# Altium PCB AD9854_V2.1_20130905.PcbDoc (part 1 of 3)
Units mil, origin at the board's own origin, x right, y up, seen from the top; angles counter-clockwise.
Board outline 3519.8 x 3096.6 mil, 2 copper layers (Top Layer, Bottom Layer); 99 components, 61 nets, 371 pads, 189 vias.
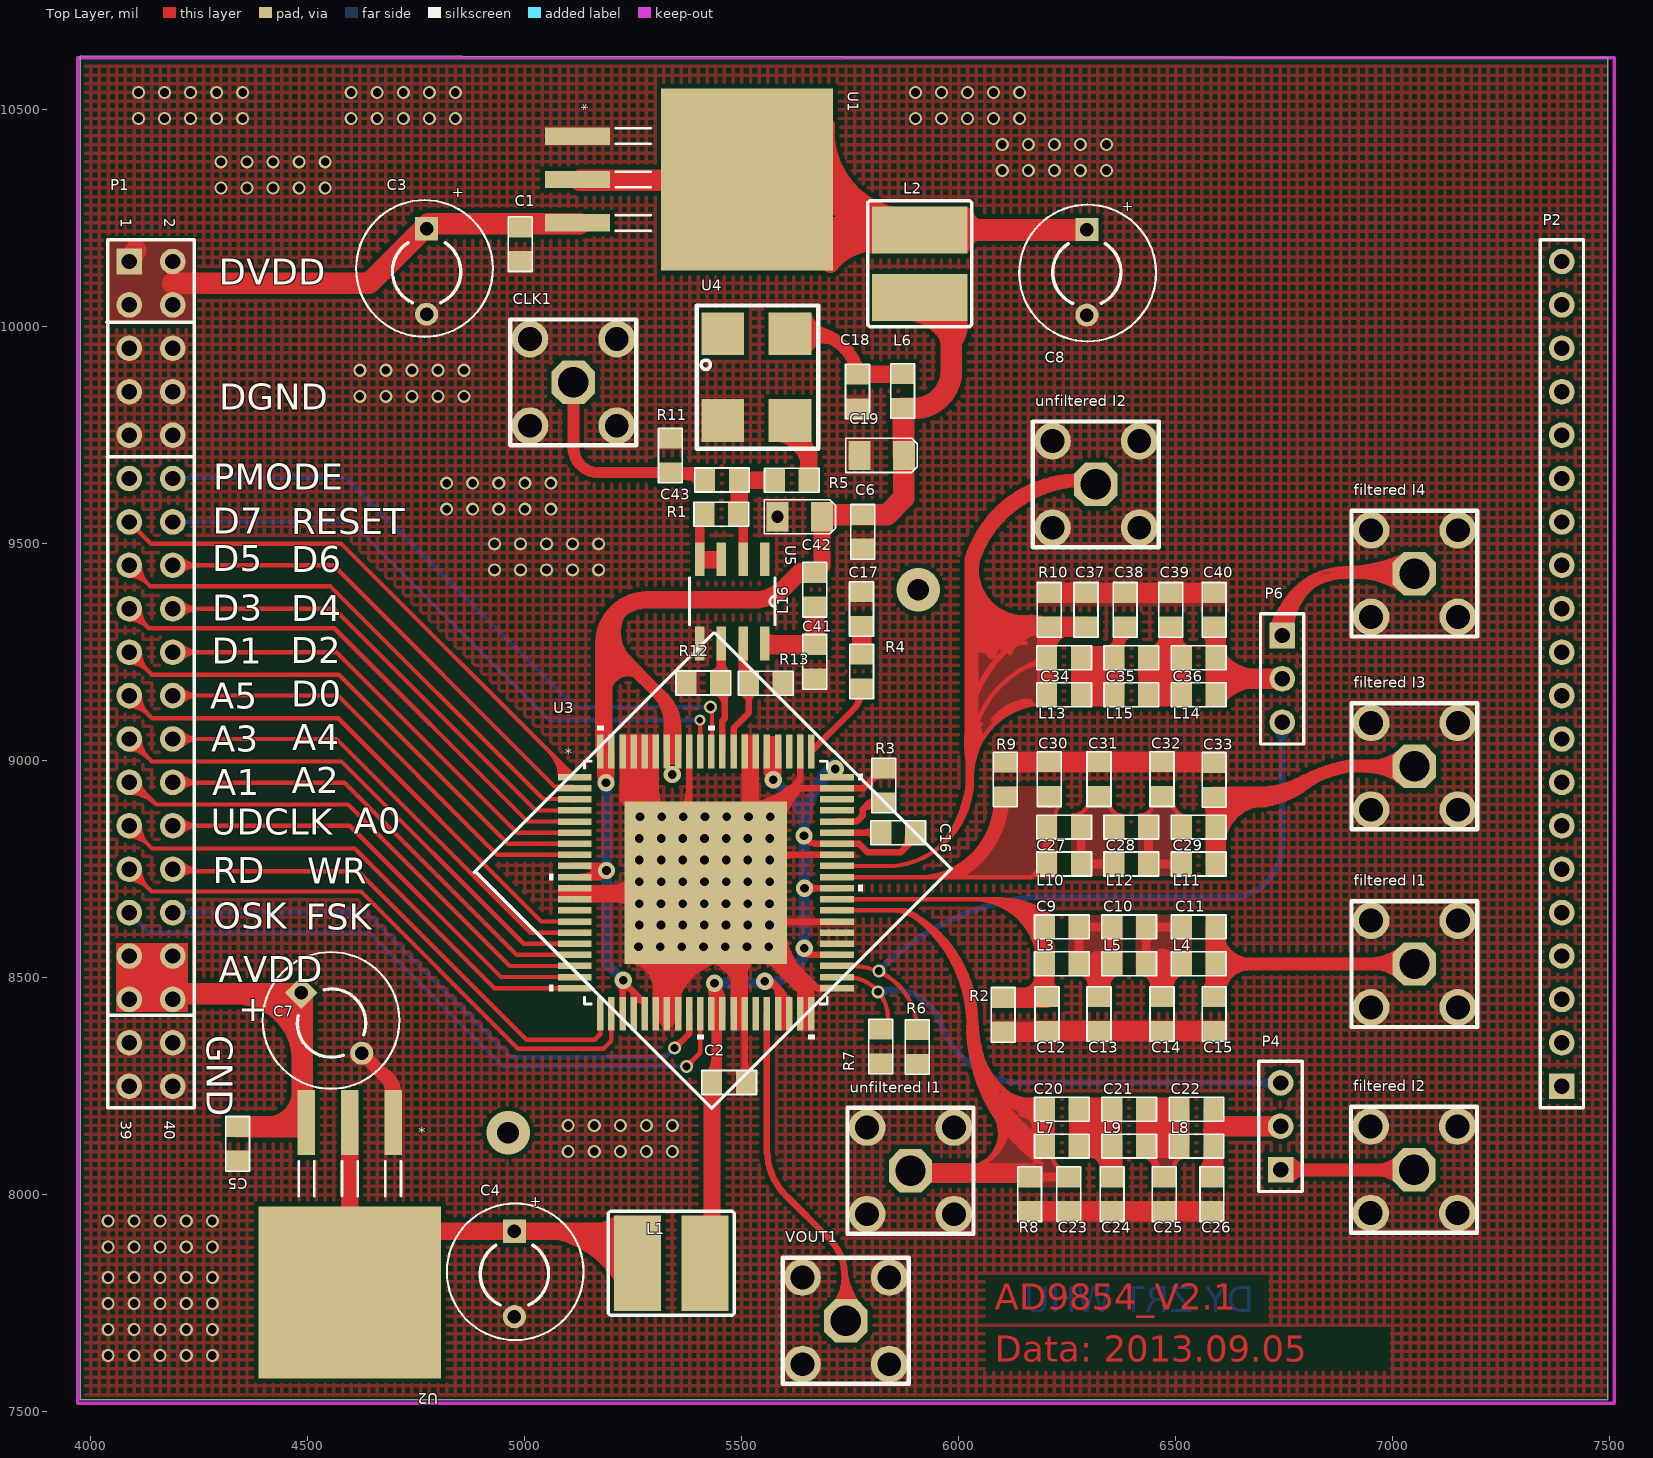
[diagram p0: Top Layer view]
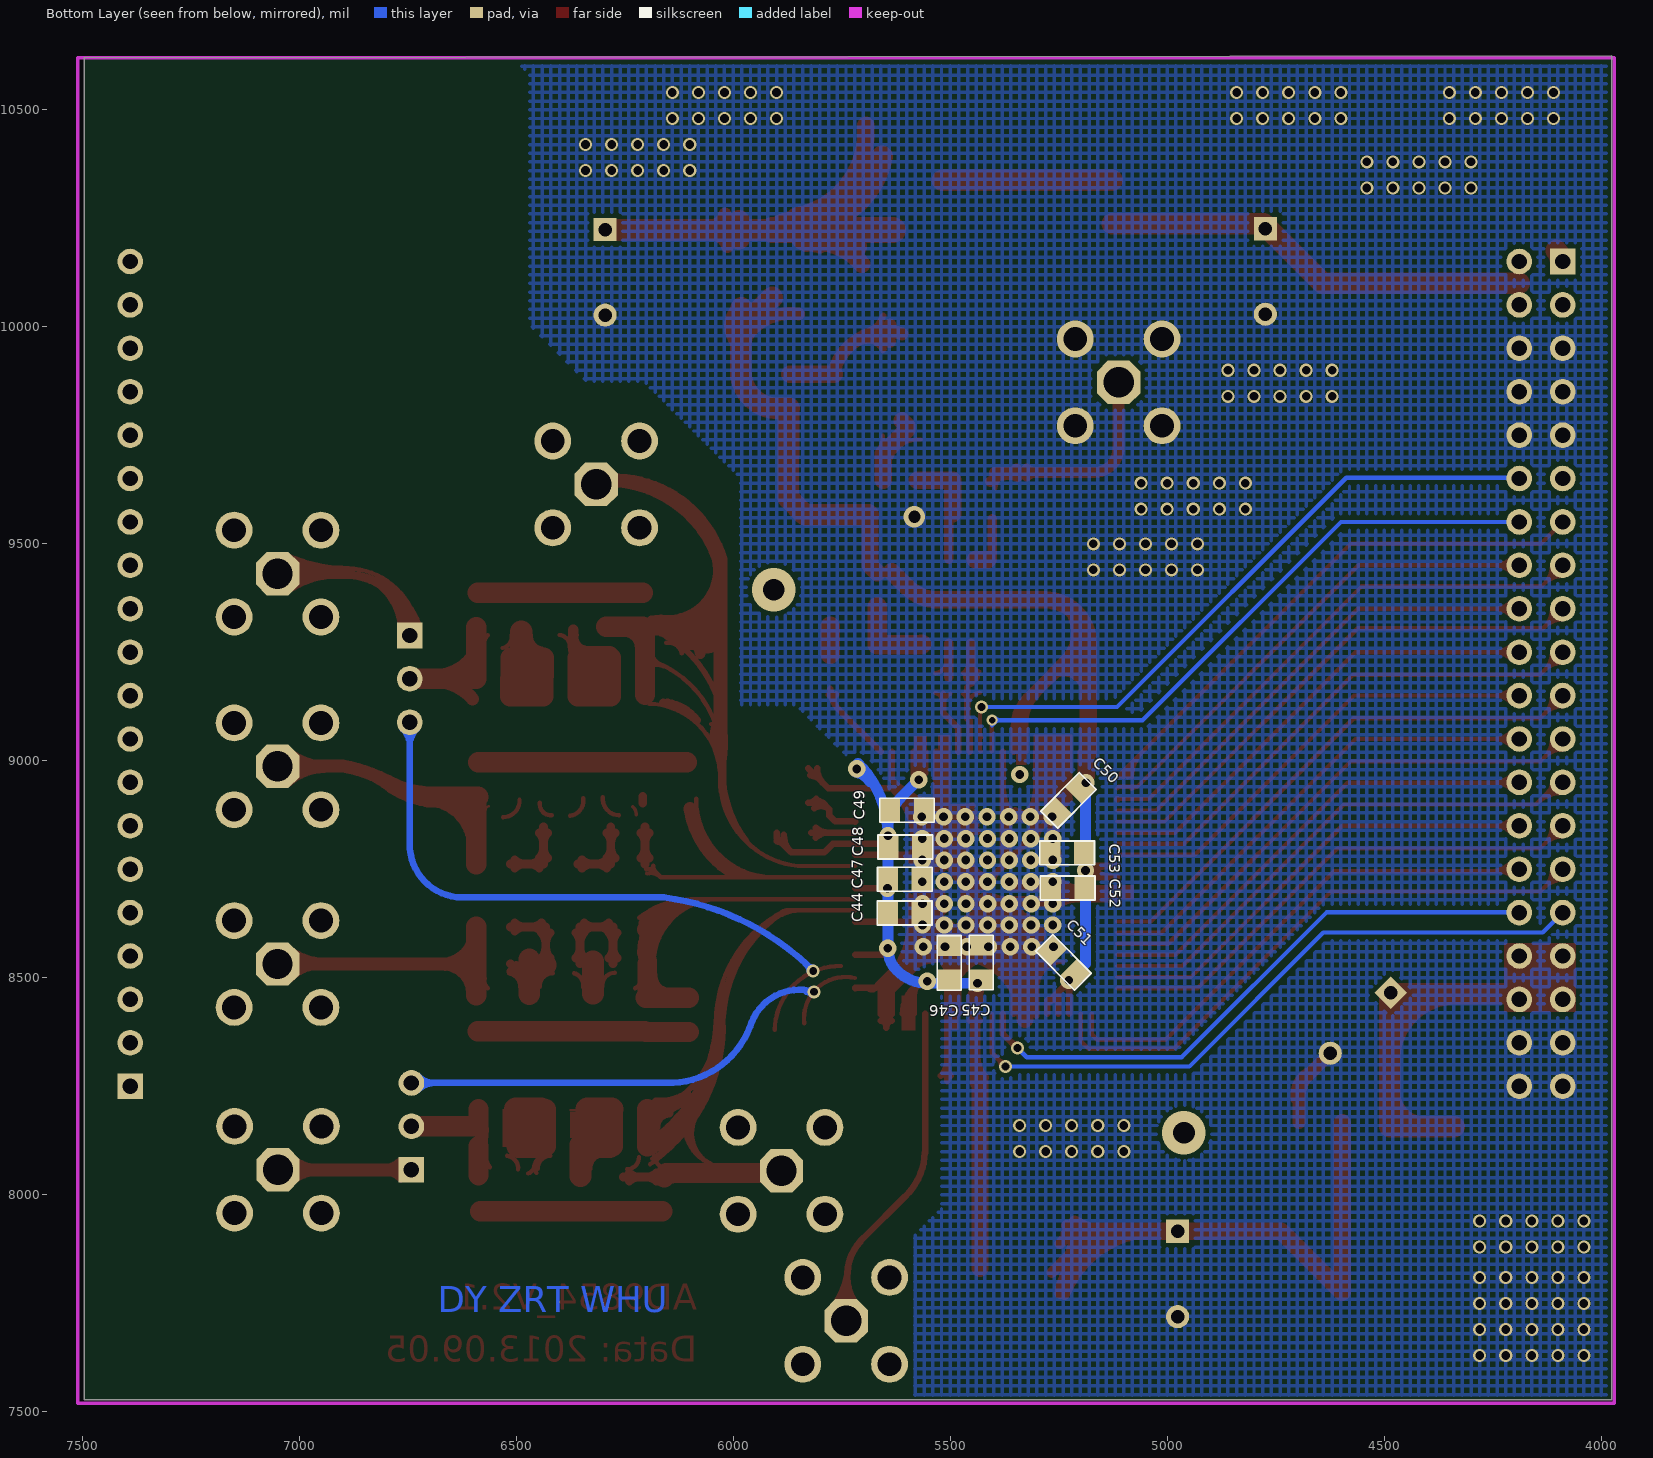
[diagram p1: Bottom Layer view, seen from below]

## Layer stack, top to bottom
Top Layer: signal copper 1.4
Dielectric: dielectric 12.6, FR-4, Dk 4.8
Bottom Layer: signal copper 1.4

## Board outline
3975.6,10624.6 3975.6,7528 7495.4,7528 7495.4,10619.5

## Design rules (kind name [scope] priority, off if disabled: settings)
Clearance [All] p1: gap=10
PlaneConnect [All] p1: planeconnectstyle=Direct reliefexpansion=20 reliefentries=4 reliefconductorwidth=10 reliefairgap=10
PolygonConnect [All] p1: connectstyle=Direct reliefconductorwidth=10 reliefentries=4 polygonreliefangle="90 Angle" airgapwidth=10
RoutingCorners [All] p1: cornerstyle=Round minsetback=100 maxsetback=100
RoutingVias [All] p1: holewidth=28 width=50 viastyle="Through Hole" minholewidth=28 minwidth=50 maxholewidth=28 maxwidth=50
SolderMaskExpansion [All] p1: expansion=4
Width [All] p1: maxlimit=60 minlimit=5 preferedwidth=10
26 further rules are at their usual default settings.

## Components (designator, comment, footprint, x,y, rotation, side; value= is the part's Value field where it differs from the comment)
C1 "Cap" 0805 4984.4,10190 r270 top
C2 "Cap" 0805 5471.23,8254 r0 top
C3 "Cap2" CAPR5-4X5 4773.8,10127.5 r270 top
C4 "Cap2" CAPR5-4X5 4976.03,7818 r270 top
C5 "Cap" 0805 4333.4,8117 r270 top
C6 "Cap" 0805 5773.43,9527 r270 top
C7 "Cap2" CAPR5-4X5 4554.8,8396 r315 top
C8 "Cap2" CAPR5-4X5 6294.83,10125.5 r270 top
C9 "Cap" 0805 6238.03,8612.5 r0 top
C10 "Cap" 0805 6393.03,8612.5 r0 top
C11 "Cap" 0805 6553.03,8612.5 r0 top
C12 "Cap" 0805 6208.03,8417.5 r90 top
C13 "Cap" 0805 6328.03,8417.5 r90 top
C14 "Cap" 0805 6473.03,8417.5 r90 top
C15 "Cap" 0805 6593.03,8417.5 r90 top
C16 "Cap" 0805 5860.63,8829.5 r0 top
C17 "Cap" 0805 5780.83,9350.5 r90 top
C18 "Cap" 0805 5761.43,9850.5 r270 top
C19 "Cap Pol" "c1206 - duplicate" 5822.03,9704 r0 top
C20 "Cap" 0805 6238.03,8192.5 r0 top
C21 "Cap" 0805 6393.03,8192.5 r0 top
C22 "Cap" 0805 6548.03,8192.5 r0 top
C23 "Cap" 0805 6258.03,8002.5 r90 top
C24 "Cap" 0805 6358.03,8002.5 r90 top
C25 "Cap" 0805 6478.03,8002.5 r90 top
C26 "Cap" 0805 6588.03,8002.5 r90 top
C27 "Cap" 0805 6243.03,8842.5 r0 top
C28 "Cap" 0805 6398.03,8842.5 r0 top
C29 "Cap" 0805 6553.03,8842.5 r0 top
C30 "Cap" 0805 6203.03,8957.5 r270 top
C31 "Cap" 0805 6318.03,8957.5 r270 top
C32 "Cap" 0805 6463.03,8957.5 r270 top
C33 "Cap" 0805 6583.03,8955.5 r270 top
C34 "Cap" 0805 6243.03,9232.5 r0 top
C35 "Cap" 0805 6398.03,9232.5 r0 top
C36 "Cap" 0805 6553.03,9232.5 r0 top
C37 "Cap" 0805 6288.03,9347.5 r270 top
C38 "Cap" 0805 6378.03,9347.5 r270 top
C39 "Cap" 0805 6483.03,9347.5 r270 top
C40 "Cap" 0805 6583.03,9347.5 r270 top
C41 "Cap" 0805 5672.83,9229 r90 top
C42 "Cap Pol" "c1206 - duplicate" 5633.63,9562.5 r0 top
C43 "Cap" 0805 5455.03,9642 r0 top
C44 "Cap" 0805 5605.4,8654.5 r0 bottom
C45 "Cap" 0805 5433.2,8535 r270 bottom
C46 "Cap" 0805 5507.2,8534 r270 bottom
C47 "Cap" 0805 5605.2,8732.5 r0 bottom
C48 "Cap" 0805 5604,8806.5 r0 bottom
C49 "Cap" 0805 5600,8891.12 r0 bottom
C50 "Cap" 0805 5223.4,8906 r135 bottom
C51 "Cap" 0805 5241.8,8532 r225 bottom
C52 "Cap" 0805 5228.8,8702 r180 bottom
C53 "Cap" 0805 5229.8,8783 r180 bottom
CLK1 "SMA" SMA 5011.83,9972 r0 top
"filtered I1" "SMA" SMA 6949.63,8432 r90 top
"filtered I2" "SMA" SMA 6948.63,7958 r90 top
"filtered I3" "SMA" SMA 6949.63,8887.5 r90 top
"filtered I4" "SMA" SMA 6949.63,9331.5 r90 top
L1 "ind" INDP6055X45N 5337.43,7842.5 r0 top
L2 "ind" INDP6055X45N 5909.63,10145.5 r270 top
L3 "ind" 0805 6238.03,8527.5 r0 top
L4 "ind" 0805 6553.03,8527.5 r0 top
L5 "ind" 0805 6393.03,8527.5 r0 top
L6 "ind" 0805 5865.43,9851.5 r270 top
L7 "ind" 0805 6238.03,8107.5 r0 top
L8 "ind" 0805 6548.03,8107.5 r0 top
L9 "ind" 0805 6393.03,8107.5 r0 top
L10 "ind" 0805 6243.03,8757.5 r0 top
L11 "ind" 0805 6553.03,8757.5 r0 top
L12 "ind" 0805 6398.03,8757.5 r0 top
L13 "ind" 0805 6243.03,9147.5 r0 top
L14 "ind" 0805 6553.03,9147.5 r0 top
L15 "ind" 0805 6398.03,9147.5 r0 top
L16 "ind" 0805 5673.03,9395 r90 top
P1 "Header 20X2" HDR2X20 4088.83,10150.5 r270 top (schematic designator P?)
P2 "Header 20" HDR1X20 7389.2,8250.5 r90 top (schematic designator P?)
P4 "Header 3" HDR1X3 6741.23,8058 r90 top
P6 "Header 3" HDR1X3 6745.03,9289 r270 top
R1 "Res" 0805 5452.03,9573 r180 top
R2 "Res" 0805 6107.03,8415.5 r90 top
R3 "Res" 0805 5831.83,8944 r90 top
R4 "Res" 0805 5781.03,9206.5 r90 top
R5 "Res" 0805 5614.43,9651.5 r180 top
R6 "Res" 0805 5909.23,8341.5 r90 top
R7 "Res" 0805 5825.03,8342.5 r90 top
R8 "Res" 0805 6168.03,8002.5 r90 top
R9 "Res" 0805 6102.03,8956.5 r270 top
R10 "Res" 0805 6203.03,9347.5 r270 top
R11 "Res" 0805 5330.43,9703 r270 top
R12 "Res" 0805 5412.03,9174.5 r0 top
R13 "Res" 0805 5554.83,9184 r180 top
U1 "LM1085_KTT_3" KTT3-M 5504,10339.5 r270 top
U2 "LM1085_KTT_3" KTT3-M 4596.8,7783.5 r180 top
U3 "AD9854ASVZ" SV_80_4-M 5417.03,8719.5 r0 top
U4 "贴片晶振" 贴片晶振 5533.03,9875 r180 top
U5 "mc100lvel16" D8 5478.03,9367.5 r270 top
"unfiltered I1" "SMA" SMA 5788.6,7955.5 r90 top
"unfiltered I2" "SMA" SMA 6215.63,9537 r90 top
VOUT1 "SMA" SMA 5639.63,7810 r0 top

## Footprints (in the part's own frame and the unit in brackets; to place one, negate y for a bottom-side part, rotate by r counter-clockwise, add the part's x,y. Pads: shape width x height; smd on the part's side, far side on the other; paste and mask are expansions set on the pad)
0805 [mm]
  rect 1.2x1.4 smd: 1(-1.016,0.127) 2(0.984,0.127)
  silkscreen extent -1.62,-0.57 1.58,0.83
"c1206 - duplicate" [mm]
  rect 1.28x1.7 smd: 1(1.3,0) 2(-1.3,0)
  silkscreen extent -2.09,-1 2.09,1
CAPR5-4X5 [mm] "Capacitor; 2 Leads"
  rect 1.35x1.35 hole 0.8: 1(-2.5,0)
  round 1.35 hole 0.8: 2(2.5,0)
  silkscreen extent -1.69,-2 1.82,2
D8 [mil]
  rect 78x22 smd: 1(-97,75) 2(-97,25) 3(-97,-25) 4(-97,-75) 5(97,-75) 6(97,-25) 7(97,25) 8(97,75)
  silkscreen extent -54,-99 54,99
HDR1X3 [mm] "Connector; Header; 3 Position"
  rect 1.5x1.5 hole 0.9: 1(0,0)
  round 1.5 hole 0.9: 2(2.54,0) 3(5.08,0)
  silkscreen extent -1.27,-1.27 6.35,1.27
HDR1X20 [mm] "Connector; Header; 20 Position"
  rect 1.5x1.5 hole 0.9: 1(0,0)
  round 1.5 hole 0.9: 2(2.54,0) 3(5.08,0) 4(7.62,0) 5(10.16,0) 6(12.7,0) 7(15.24,0) 8(17.78,0) 9(20.32,0) 10(22.86,0) 11(25.4,0) 12(27.94,0) 13(30.48,0) 14(33.02,0) 15(35.56,0) 16(38.1,0) 17(40.64,0) 18(43.18,0) 19(45.72,0) 20(48.26,0)
  silkscreen extent -1.27,-1.27 49.53,1.27
HDR2X20 [mm] "Connector; Header; 20x2 Position"
  rect 1.5x1.5 hole 0.9: 1(0,0)
  round 1.5 hole 0.9: 2(0,2.54) 3(2.54,0) 4(2.54,2.54) 5(5.08,0) 6(5.08,2.54) 7(7.62,0) 8(7.62,2.54) 9(10.16,0) 10(10.16,2.54) 11(12.7,0) 12(12.7,2.54) 13(15.24,0) 14(15.24,2.54) 15(17.78,0) 16(17.78,2.54) 17(20.32,0) 18(20.32,2.54) 19(22.86,0) 20(22.86,2.54) 21(25.4,0) 22(25.4,2.54) 23(27.94,0) 24(27.94,2.54) 25(30.48,0) 26(30.48,2.54) 27(33.02,0) 28(33.02,2.54) 29(35.56,0) 30(35.56,2.54) 31(38.1,0) 32(38.1,2.54) 33(40.64,0) 34(40.64,2.54) 35(43.18,0) 36(43.18,2.54) 37(45.72,0) 38(45.72,2.54) 39(48.26,0) 40(48.26,2.54)
  silkscreen extent -1.27,-1.27 49.53,3.81
INDP6055X45N [mm] "Precision Wire Wound Inductor, 2-Leads, Body 6.05x5.50mm, IPC Medium Density"
  rect 2.75x5.6 smd: 1(-1.975,0) 2(1.975,0)
  silkscreen extent -3.68,-3.05 3.68,3.05
KTT3-M [mil]
  rect 40x150 smd: 1(-100,-383) 2(0,-383) 3(100,-383)
  rect 420x396 smd: 4(0,8)
  silkscreen extent -118,-294 118,-214
SMA [mil]
  oct 100x100 hole 70: 1(100,-100)
  round 85 hole 55: 2(0,0) 3(200,0) 4(200,-200) 5(0,-200)
  silkscreen extent -45,-245 245,45
SV_80_4-M [mil]
  rect 78x15 smd mask+4: 1(-302,243.11) 2(-302,217.52) 3(-302,191.93) 4(-302,166.34) 5(-302,140.75) 6(-302,115.16) 7(-302,89.57) 8(-302,63.98) 9(-302,38.39) 10(-302,12.8) 11(-302,-12.8) 12(-302,-38.39) 13(-302,-63.98) 14(-302,-89.57) 15(-302,-115.16) 16(-302,-140.75) 17(-302,-166.34) 18(-302,-191.93) 19(-302,-217.52) 20(-302,-243.11) 41(302,-243.11) 42(302,-217.52) 43(302,-191.93) 44(302,-166.34) 45(302,-140.75) 46(302,-115.16) 47(302,-89.57) 48(302,-63.98) 49(302,-38.39) 50(302,-12.8) 51(302,12.8) 52(302,38.39) 53(302,63.98) 54(302,89.57) 55(302,115.16) 56(302,140.75) 57(302,166.34) 58(302,191.93) 59(302,217.52) 60(302,243.11)
  rect 15x78 smd mask+4: 21(-243.11,-302) 22(-217.52,-302) 23(-191.93,-302) 24(-166.34,-302) 25(-140.75,-302) 26(-115.16,-302) 27(-89.57,-302) 28(-63.98,-302) 29(-38.39,-302) 30(-12.8,-302) 31(12.8,-302) 32(38.39,-302) 33(63.98,-302) 34(89.57,-302) 35(115.16,-302) 36(140.75,-302) 37(166.34,-302) 38(191.93,-302) 39(217.52,-302) 40(243.11,-302) 61(243.11,302) 62(217.52,302) 63(191.93,302) 64(166.34,302) 65(140.75,302) 66(115.16,302) 67(89.57,302) 68(63.98,302) 69(38.39,302) 70(12.8,302) 71(-12.8,302) 72(-38.39,302) 73(-63.98,302) 74(-89.57,302) 75(-115.16,302) 76(-140.75,302) 77(-166.34,302) 78(-191.93,302) 79(-217.52,302) 80(-243.11,302)
  rect 374x374 smd: 81(0,0)
  silkscreen extent -361,-361 361,361
贴片晶振 [mil]
  rect 98.43x98.43 smd: 1(77,-109) 2(77,91) 3(-78,91) 4(-78,-109)
  silkscreen extent -143,-174 137,156

## Part data
C1 C2 C3 C4 C5 C6 C7 C8 C9 C10 C11 C12 C13 C14 C15 C16 C17 C18 C20 C21 C22 C23 C24 C25 C26 C27 C28 C29 C30 C31 C32 C33 C34 C35 C36 C37 C38 C39 C40 C41 C43 C44 C45 C46 C47 C48 C49 C50 C51 C52 C53: "Capacitor"
C19 C42: "Polarized Capacitor (Axial)"
L1 L2 L3 L4 L5 L6 L7 L8 L9 L10 L11 L12 L13 L14 L15 L16 R1 R2 R3 R4 R5 R6 R7 R8 R9 R10 R11 R12 R13: "Resistor"
P1: "Header, 20-Pin, Dual row"
P2: "Header, 20-Pin"
P4 P6: "Header, 3-Pin"
U1 U2 U3: "Imported"

## Via types
v1: diameter 30, hole 20, Top Layer to Bottom Layer, 120 vias
v2: diameter 40, hole 20, Top Layer to Bottom Layer, 60 vias
v3: diameter 30, hole 18, Top Layer to Bottom Layer, 5 vias
v4: diameter 100, hole 50, Top Layer to Bottom Layer, 2 vias
v5: diameter 50, hole 28, Top Layer to Bottom Layer, 1 vias
v6: diameter 25, hole 15, Top Layer to Bottom Layer, 1 vias

## Nets (pads, with @x,y where several pads share a name; then routed paths per layer and width w, separated by ;. In a path a pad name is that pad's centre, name@x,y a point inside that pad or via, vN(x,y) a via of type N, cw(c..) or ccw(c..) an arc to the next point about the centre after c; other vN are vias at no path point)
A0: P1.28 U3.19 | length 1218.7
  Top Layer w10: P1.28@4188.83,8850.5 4596.73,8850.5 4945.25,8501.98 U3.19@5115.03,8501.98 ; P1.28@4199.11,8840.23 cw(c4223.91,8815.43) 4223.91,8850.5 cw(c4223.91,8885.57) P1.28@4199.11,8860.77 ; P1.28@4206.18,8833.16 cw(c4248.05,8791.29) 4248.05,8850.5 cw(c4248.05,8909.71) P1.28@4206.18,8867.84
A1: P1.25 U3.18 | length 1374
  Top Layer w10: P1.25@4088.83,8925.97 cw(c4088.83,8840.2) 4149.48,8900.85 ; P1.25@4088.83,8935.97 cw(c4088.83,8874.34) 4132.41,8917.92 ; P1.25@4088.83,8945.97 cw(c4088.83,8908.49) 4115.34,8934.99 ; P1.25@4090.83,8959.5 4150.83,8899.5 4593.23,8899.5 4965.16,8527.57 U3.18@5115.03,8527.57 ; P1.25@4113.36,8950.5 ccw(c4146.02,8950.5) 4122.93,8927.41
A2: P1.26 U3.17 | length 1238.7
  Top Layer w10: P1.26@4188.83,8949.94 4584.22,8949.94 4981,8553.16 U3.17@5115.03,8553.16 ; P1.26@4199.11,8940.23 cw(c4222.55,8916.79) 4222.55,8949.94 ; P1.26@4199.11,8960.77 ccw(c4225.26,8986.93) 4225.26,8949.94 ; P1.26@4206.18,8933.16 cw(c4246.69,8892.64) 4246.69,8949.94 ; P1.26@4206.18,8967.84 ccw(c4249.41,9011.07) 4249.41,8949.94
A3: P1.23 U3.16 | length 1369.7
  Top Layer w10: P1.23@4088.83,9025.97 cw(c4088.83,8966.76) 4130.7,9008.63 cw(c4172.58,9050.5) P1.23@4113.36,9050.5 ; P1.23@4088.83,9035.97 cw(c4088.83,9000.9) 4113.63,9025.7 cw(c4138.43,9050.5) P1.23@4103.36,9050.5 ; P1.23@4088.83,9050.5 4140.83,8998.5 4577.63,8998.5 4997.38,8578.75 U3.16@5115.03,8578.75
A4: P1.24 U3.15 | length 1259.1
  Top Layer w10: P1.24@4188.83,9050.5 4566.33,9050.5 5012.49,8604.34 U3.15@5115.03,8604.34 ; P1.24@4199.11,9040.23 cw(c4223.91,9015.43) 4223.91,9050.5 cw(c4223.91,9085.57) P1.24@4199.11,9060.77 ; P1.24@4206.18,9033.16 cw(c4248.05,8991.29) 4248.05,9050.5 cw(c4248.05,9109.71) P1.24@4206.18,9067.84
A5: P1.21 U3.14 | length 1389.9
  Top Layer w10: P1.21@4088.83,9125.97 cw(c4088.83,9066.76) 4130.7,9108.63 cw(c4172.58,9150.5) P1.21@4113.36,9150.5 ; P1.21@4088.83,9135.97 cw(c4088.83,9100.9) 4113.63,9125.7 cw(c4138.43,9150.5) P1.21@4103.36,9150.5 ; P1.21@4088.83,9150.5 4141.33,9098 4570.03,9098 5038.1,8629.93 U3.14@5115.03,8629.93
AVDD: C2.1 C16.2 C44.2 C45.2 C46.2 C47.2 C48.2 C49.2 L1.2 U3.31 U3.32 U3.37 U3.38 U3.44 U3.50 U3.54 U3.60 U3.64 U3.65 | length 3159.2
  Top Layer w15: v2@5428.16,8478.86 cw(c5406.34,8457.04) 5437.2,8457.04 ; U3.31@5431.57,8400.9 cw(c5430.31,8390.13) 5440.78,8392.94 ; 5431.92,8460.33 cw(c5417.52,8457.12) 5429.83,8449 ccw(c5412.03,8466.8) 5437.2,8466.8 ; 5432.14,8459.32 cw(c5446.16,8462.45) v2@5441.26,8475.95 ; U3.31@5436.7,8430.84 cw(c5434.48,8426.53) 5439.2,8427.58 ; v2@5437,8496 v2(5437,8487.7) v2@5437.2,8487.5 ; 5437.2,8458.01 cw(c5466.69,8458.01) v2@5445.84,8478.86 ; 5442.23,8414 5442.11,8414.54 5440.9,8419.96 U3.31@5437.2,8436.59 ; 5442.73,8411.75 ccw(c5453.79,8414.21) U3.32@5448.75,8404.06 ; 5445.4,8390.99 cw(c5455.41,8390.99) U3.32@5455.4,8401 ; 5445.4,8406.01 cw(c5455.39,8406.01) U3.32@5455.38,8416 ; 5445.4,8421.02 cw(c5455.38,8421.02) U3.32@5455.36,8431 ; 5445.4,8436.04 cw(c5455.36,8436.04) U3.32@5455.35,8446 ; 5450,8458.5 ccw(c5461.11,8447.39) 5445.4,8447.39 5445.4,8386.5 cw(c5465.2,8406.3) 5437.2,8406.3 U3.31@5437.2,8436.59 ; U3.32@5455.42,8417.5 5455.42,8443.52 ccw(c5393.22,8443.52) v2@5437.2,8487.5 ; v2@5552.51,8494.48 cw(c5555.13,8471.94) 5574.79,8483.29 ; 5557.78,8971.35 U3.65@5557.78,9021.5 ccw(c5636.18,9021.5) v2@5581.37,8965.44 ; U3.65@5557.78,8985.85 ccw(c5601.33,8985.85) v2@5570.89,8954.71 ; v2@5558.07,8480.67 cw(c5568.04,8459.24) 5584.75,8475.95 ; v2@5563.79,8965.34 ccw(c5516.53,9012.6) U3.64@5583.37,9012.6 ; v2(5572.63,8956.5) 5583.37,8967.24 U3.64@5583.37,9021.5 ; v2@5574.4,8954.73 ccw(c5552.74,8976.39) 5583.37,8976.39 ; U3.37@5583.37,8417.5 5583.37,8460.11 ccw(c5541.81,8460.11) 5571.2,8489.5 5584.75,8475.95 ; U3.38@5608.96,8417.5 ccw(c5526.3,8417.5) 5584.75,8475.95 ; v2@5643,8822 ccw(c5674.22,8853.22) 5674.22,8809.07 U3.54@5719.03,8809.07 5770.14,8809.07 5789.76,8789.44 5866.59,8789.44 ; v2@5644,8558 ccw(c5655.68,8569.68) 5655.68,8553.16 U3.44@5719.03,8553.16 ; v2(5644.4,8706.7) U3.50@5719.03,8706.7 ; v2@5653.24,8697.87 cw(c5674.58,8676.53) 5674.58,8706.7 cw(c5674.58,8736.88) v2@5653.24,8715.54 ; C16.2@5883.25,8830.37 cw(c5826.37,8829.67) 5866.59,8789.44 ; C16.2@5886.09,8808.94 cw(c5899.37,8795.66) C16.2@5899.37,8814.44 ; C16.2@5899.37,8834.5 5899.37,8822.22 5866.59,8789.44 ; U3.31@5437.2,8436.59 5429.83,8469.7 cw(c5455,8469.7) v2@5437.2,8487.5 ; U3.31@5437.2,8436.59 v2@5437.2,8487.5 ; 5442.74,8411.69 ccw(c5453.68,8414.13) 5448.55,8404.16 cw(c5453.69,8414.13) 5442.74,8411.69
  Top Layer w25: C2.1@5423.37,8270.8 ccw(c5377.84,8316.33) 5442.23,8316.33 ; C2.1@5442.23,8256.9 5442.23,8414
  Top Layer w40: L1.2@5431.23,7831.04 C2.1@5431.23,8259
  Bottom Layer w15: C48.2@5643.03,8826 v2@5643.03,8844.68
  Bottom Layer w25: v2(5437,8487.7) 5551.68,8487.7 ccw(c5551.68,8587.7) 5622.39,8516.99 ccw(c5571.59,8567.79) 5643.43,8567.79 C47.2@5643.43,8705.57 ; v2(5572.63,8956.5) 5613.74,8915.39 cw(c5543.03,8844.68) v2@5643.03,8844.68 ; v2(5643.2,8827.5) cw(c5879.31,8827.5) v2@5712.35,8994.45 ; C47.2@5643.23,8707 C48.2@5643.23,8822.6 ; C47.2@5643.23,8727.63 ccw(c5665.32,8727.63) C47.2@5649.7,8712.01 ; 5643.43,8686.26 cw(c5664.84,8686.26) C47.2@5649.7,8701.4 ; 5685.27,8952.25 cw(c5727.5,8925.16) v2@5716.8,8974.17
  other v2: 5552.8,8492 5643.8,8568 5715.2,8981.5
AVDDIN: C5.1 C7.1 P1.33 P1.34 P1.35 P1.36 U2.3 | length 1312.9
  Top Layer w10: 4336.8,8443.5 cw(c4334,8309.3) 4468.2,8306.5 ; 4409.8,8176.5 ccw(c4407.6,8236.3) 4467.4,8238.5
  Top Layer w30: 4109.43,8511 4127.83,8511 ; 4383.57,8445.2 cw(c4370.32,8347.95) 4466.4,8368 ; 4421.8,8457.5 cw(c4409.55,8398.25) 4468.8,8386
  Top Layer w50: P1.36@4168.8,8463.5 4487.3,8463.5 4487.3,8157 C5.1@4338.4,8157
CLK: R12.2 U3.69 U5.6 | length 402.6
  Top Layer w10: R12.2@5432.23,9157 cw(c5429.51,9128.59) 5458.03,9129.5 ; R12.2@5432.83,9206 ccw(c5429.53,9223.7) 5447.23,9227 ; 5458.94,9229.22 ccw(c5485.58,9224.85) R12.2@5470.43,9202.5 ; 5462.91,9141.15 cw(c5476.16,9142.4) R12.2@5469.63,9154
  Top Layer w15: U3.69@5455.42,9021.5 5455.42,9092.49 5460.33,9097.4 R12.2@5460.33,9169.94
  Top Layer w22: R12.2@5441.85,9192.36 ccw(c5414.85,9219.36) 5453.03,9219.36 ; R12.2@5453.03,9181.76 U5.6@5453.03,9270.5 ; 5453.03,9208.45 ccw(c5475.79,9208.45) R12.2@5459.7,9192.36
CLKB: R13.2 U3.68 U5.7 | length 329.4
  Top Layer w10: R13.2@5499.66,9154.67 cw(c5490.38,9132.55) 5513.83,9127.5 ; U5.7@5508.63,9231.5 ccw(c5536.62,9230.09) R13.2@5534.29,9202.16 ; 5518.37,9136.91 cw(c5537.68,9137.39) R13.2@5534.83,9156.5
  Top Layer w15: U3.68@5481.01,9021.5 5481.01,9075.48 5516.09,9110.56 R13.2@5516.09,9154.8
  Top Layer w22: R13.2@5503.03,9193.26 U5.7@5503.03,9270.5
D0: P1.22 U3.8 | length 1226.3
  Top Layer w10: P1.22@4188.83,9150.5 4569.63,9150.5 4936.66,8783.48 U3.8@5115.03,8783.48 ; P1.22@4199.11,9140.23 cw(c4223.91,9115.43) 4223.91,9150.5 cw(c4223.91,9185.57) P1.22@4199.11,9160.77 ; P1.22@4206.18,9133.16 cw(c4248.05,9091.29) 4248.05,9150.5 cw(c4248.05,9209.71) P1.22@4206.18,9167.84
D1: P1.19 U3.7 | length 1357.2
  Top Layer w10: P1.19@4088.83,9225.97 cw(c4088.83,9166.76) 4130.7,9208.63 cw(c4172.58,9250.5) P1.19@4113.36,9250.5 ; P1.19@4088.83,9235.97 cw(c4088.83,9200.9) 4113.63,9225.7 cw(c4138.43,9250.5) P1.19@4103.36,9250.5 ; P1.19@4088.83,9250.5 4140.83,9198.5 4571.63,9198.5 4961.07,8809.07 U3.7@5115.03,8809.07
D2: P1.20 U3.6 | length 1246.6
  Top Layer w10: P1.20@4188.83,9250.5 4566.33,9250.5 4982.18,8834.66 U3.6@5115.03,8834.66 ; P1.20@4199.11,9240.23 cw(c4223.91,9215.43) 4223.91,9250.5 cw(c4223.91,9285.57) P1.20@4199.11,9260.77 ; P1.20@4206.18,9233.16 cw(c4248.05,9191.29) 4248.05,9250.5 cw(c4248.05,9309.71) P1.20@4206.18,9267.84
D3: P1.17 U3.5 | length 1377.4
  Top Layer w10: P1.17@4088.83,9325.97 cw(c4088.83,9266.76) 4130.7,9308.63 cw(c4172.58,9350.5) P1.17@4113.36,9350.5 ; P1.17@4088.83,9335.97 cw(c4088.83,9300.9) 4113.63,9325.7 cw(c4138.43,9350.5) P1.17@4103.36,9350.5 ; P1.17@4088.83,9350.5 4133.83,9305.5 4561.03,9305.5 5006.29,8860.25 U3.5@5115.03,8860.25
D4: P1.18 U3.4 | length 1266.8
  Top Layer w10: P1.18@4188.83,9350.5 4560.63,9350.5 5025.29,8885.84 U3.4@5115.03,8885.84 ; P1.18@4199.11,9340.23 cw(c4223.91,9315.43) 4223.91,9350.5 cw(c4223.91,9385.57) P1.18@4199.11,9360.77 ; P1.18@4206.18,9333.16 cw(c4248.05,9291.29) 4248.05,9350.5 cw(c4248.05,9409.71) P1.18@4206.18,9367.84
D5: P1.15 U3.3 | length 1397.6
  Top Layer w10: P1.15@4088.83,9425.97 cw(c4088.83,9366.76) 4130.7,9408.63 cw(c4172.58,9450.5) P1.15@4113.36,9450.5 ; P1.15@4088.83,9435.97 cw(c4088.83,9400.9) 4113.63,9425.7 cw(c4138.43,9450.5) P1.15@4103.36,9450.5 ; P1.15@4088.83,9450.5 4137.33,9402 4552.43,9402 5042.41,8912.02 U3.3@5114.44,8912.02
  Top Layer w15: U3.3@5114.44,8912.02 U3.3@5115.03,8911.43
D6: P1.16 U3.2 | length 1300
  Top Layer w10: P1.16@4188.83,9450.5 4559.43,9450.5 5069.82,8940.11 5111.94,8940.11 U3.2@5115.03,8937.02 ; P1.16@4199.11,9440.23 cw(c4223.91,9415.43) 4223.91,9450.5 cw(c4223.91,9485.57) P1.16@4199.11,9460.77 ; P1.16@4206.18,9433.16 cw(c4248.05,9391.29) 4248.05,9450.5 cw(c4248.05,9509.71) P1.16@4206.18,9467.84 ; 5070.04,8940.11 cw(c5070.04,8923.52) U3.2@5081.77,8935.25
D7: P1.13 U3.1 | length 1413.8
  Top Layer w10: P1.13@4088.83,9550.5 4139.33,9500 4577.64,9500 U3.1@5115.03,8962.61 ; 5056.99,9020.65 cw(c4998.95,8962.61) U3.1@5081.03,8962.61 ; 5074.06,9003.58 cw(c5033.09,8962.61) U3.1@5091.03,8962.61 ; 5091.13,8986.51 cw(c5067.23,8962.61) U3.1@5101.03,8962.61 ; U3.1@5108.2,8969.44 cw(c5101.38,8962.61) U3.1@5111.03,8962.61
DGND: "filtered I1.2" "filtered I1.3" "filtered I1.4" "filtered I1.5" "filtered I2.2" "filtered I2.3" "filtered I2.4" "filtered I2.5" "filtered I3.2" "filtered I3.3" "filtered I3.4" "filtered I3.5" "filtered I4.2" "filtered I4.3" "filtered I4.4" "filtered I4.5" "unfiltered I1.2" "unfiltered I1.3" "unfiltered I1.4" "unfiltered I1.5" "unfiltered I2.2" "unfiltered I2.3" "unfiltered I2.4" "unfiltered I2.5" C1.2 C2.2 C3.2 C4.2 C5.2 C6.2 C7.2 C8.2 C12.1 C13.1 C14.1 C15.1 C17.2 C18.2 C19.2 C23.1 C24.1 C25.1 C26.1 C30.1 C31.1 C32.1 C33.1 C37.1 C38.1 C39.1 C40.1 C41.1 C42.2 C44.1 C45.1 C46.1 C47.1 C48.1 C49.1 C50.1 C51.1 C52.1 C53.1 CLK1.2 CLK1.3 CLK1.4 CLK1.5 P1.5 P1.6 P1.7 P1.8 P1.9 P1.10 P1.37 P1.38 P1.39 P1.40 R2.1 R3.2 R6.1 R7.1 R8.1 R9.1 R10.1 R11.1 R12.1 R13.1 U1.1 U2.1 U3.11 U3.12 U3.26 U3.27 U3.28 U3.33 U3.34 U3.39 U3.40 U3.41 U3.45 U3.46 U3.47 U3.53 U3.59 U3.62 U3.66 U3.67 U3.72 U3.75 U3.76 U3.77 U3.78 U3.81 U4.2 U5.5 VOUT1.2 VOUT1.3 VOUT1.4 VOUT1.5 | length 43097.2
  Top Layer w10: 4647.2,8293.5 cw(c4592.4,8216.3) U2.1@4687.07,8216.46 ; 4656,8297.5 cw(c4642.6,8229.9) U2.1@4710.2,8216.5 ; U3.81@5239.8,8537.5 cw(c5238.5,8476.8) 5299.2,8475.5 ; U3.81@5273.8,8536 cw(c5265.75,8508.55) 5294.28,8506.52